# Altium PCB CCS_V4.0.PcbDoc
Units mil, origin at the board's own origin, x right, y up, seen from the top; angles counter-clockwise.
Board outline 2315.79 x 4272.71 mil, 2 copper layers (Top Layer, Bottom Layer); 71 components, 66 nets, 351 pads, 54 vias.
Unrouted connection lines stored in the file: 1.
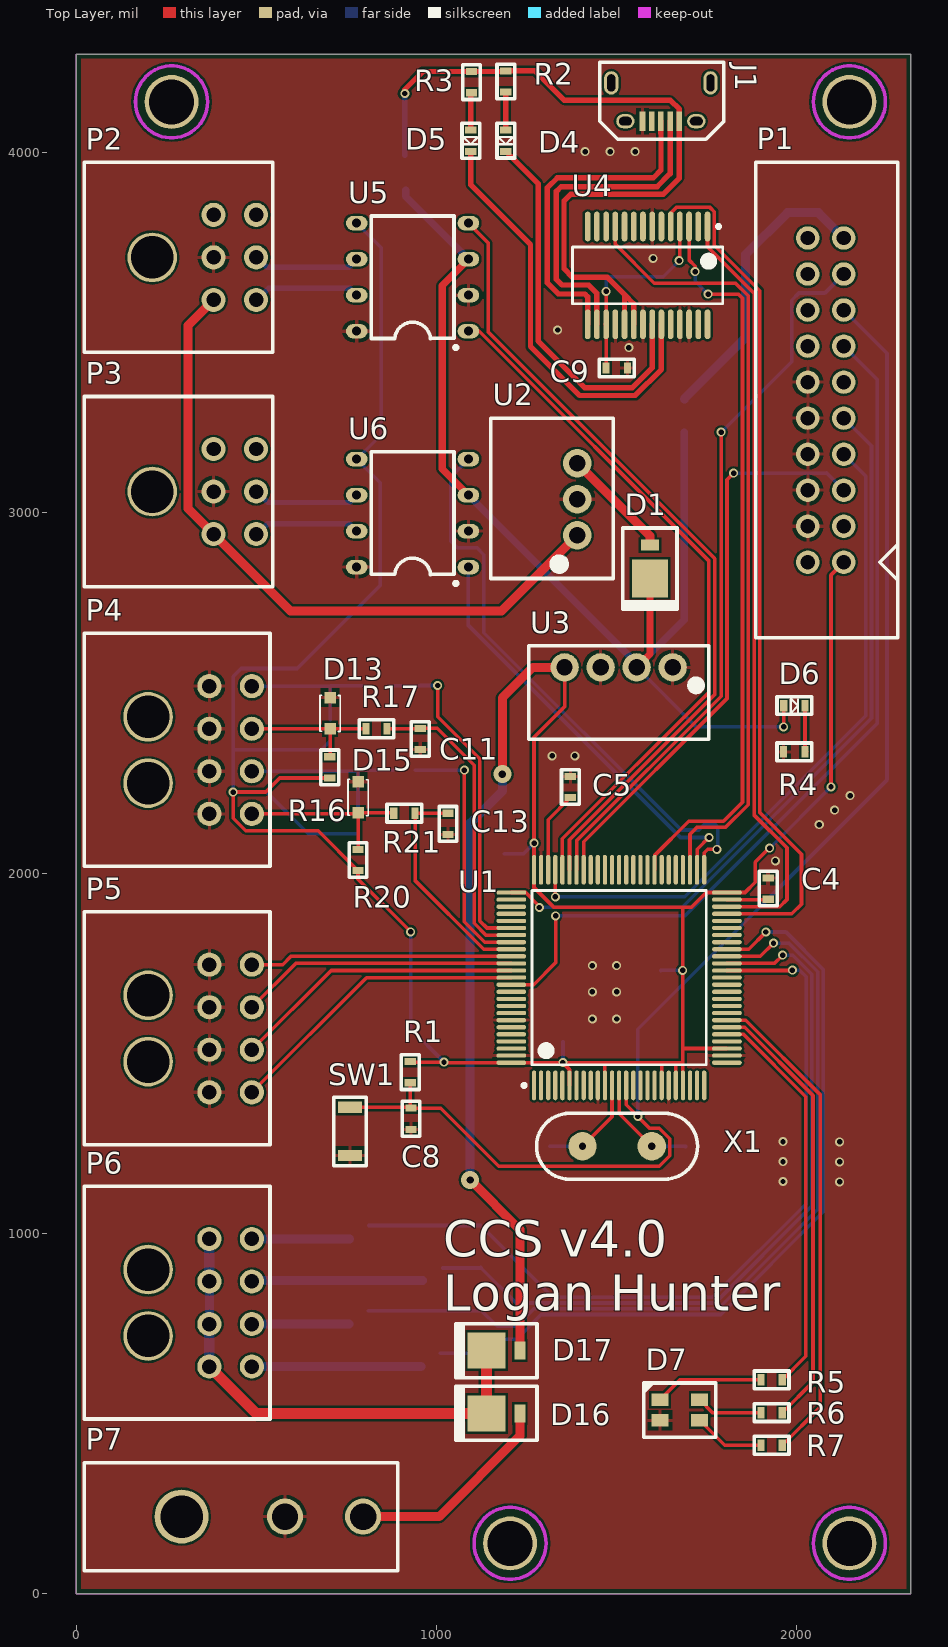
[diagram p0: Top Layer view]
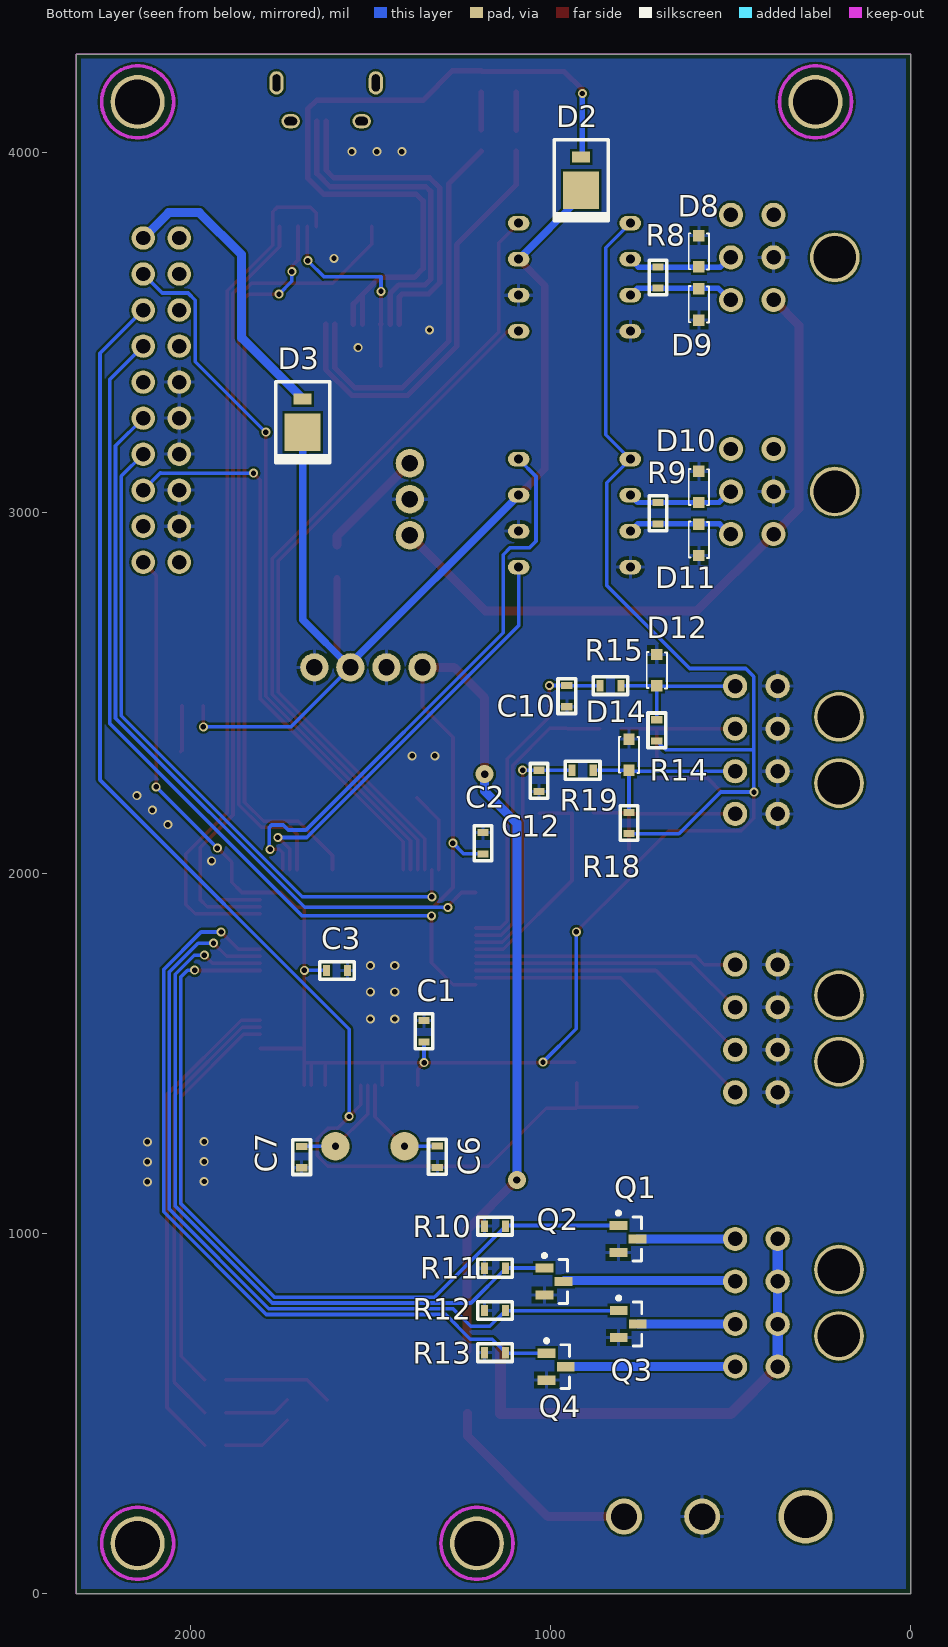
[diagram p1: Bottom Layer view, seen from below]

## Layer stack, top to bottom
Top Solder: solder mask 0.4, Solder Resist, Dk 3.5
Top Layer: signal copper 1.4
Dielectric 1: dielectric 12.6, FR-4, Dk 4.8
Bottom Layer: signal copper 1.4
Bottom Solder: solder mask 0.4, Solder Resist, Dk 3.5

## Board outline
0,0 2315.78,0 2315.78,4272.71 0,4272.71

## Design rules (kind name [scope] priority, off if disabled: settings)
Clearance [All] p1: gap=6 ignorepadtopadclearanceinfootprint=FALSE except(0: Arc-Hole Track-Hole SMDPad-Hole THPad-Hole Via-Hole Fill-Hole Poly-Hole Region-Hole Text-Hole)
DiffPairsRouting [All] p1: maxlimit=10 minlimit=10 mostfreqgap=10 toplayer_minwidth=15 toplayer_maxwidth=15 toplayer_prefwidth=15 bottomlayer_minwidth=15 bottomlayer_maxwidth=15 bottomlayer_prefwidth=15 maxuncoupledlength=500
HoleSize [All] p1: absolutevalues=TRUE maxlimit=200 minlimit=6 maxpercent=80.000 minpercent=20.000
MinimumSolderMaskSliver [All] p1: minsoldermaskwidth=1
PolygonConnect GroundVia [IsVia and InNet('GND')] p1: connectstyle=Direct reliefconductorwidth=10 reliefentries=4 polygonreliefangle="90 Angle" airgapwidth=10
PolygonConnect PolygonConnect_1 [All] p2: connectstyle=Relief reliefconductorwidth=10 reliefentries=4 polygonreliefangle="90 Angle" airgapwidth=10
RoutingVias [All] p1: holewidth=20 width=30 viastyle="Through Hole" minholewidth=12 minwidth=20 maxholewidth=70 maxwidth=100
SilkToSilkClearance [All] p1: silktosilkclearance=3
SilkToSolderMaskClearance [IsPad] p1: minsilkscreentomaskgap=2 clearancetoexposedcopper=TRUE
SolderMaskExpansion [All] p1: expansion=4
Width [All] p1: maxlimit=30 minlimit=5 preferedwidth=10
25 further rules are at their usual default settings.

## Classes and differential pairs
component class Power: C1 C2 C3 C8 D1 D2 D3 D6 R1 R4 SW1 U2 U3
component class MCU: C4 C5 C6 C7 D7 R5 R6 R7 U1 X1
component class Connectors: C10 C11 C12 C13 D8 D9 D10 D11 D12 D13 D14 D15 D16 D17 J1 P1 P2 P3 P4 P5 P6 P7 R14 R15 R16 R17 R18 R19 R20 R21
component class Communications: C9 D4 D5 R2 R3 R8 R9 U4 U5 U6
component class "12V Input Circuitry": Q1 Q2 Q3 Q4 R10 R11 R12 R13
differential pair USBD: +USBD_P -USBD_N
differential pair CAN2: +CAN2_P -CAN2_N
differential pair CAN1: +CAN1_P -CAN1_N

## Components (designator, comment, footprint, x,y, rotation, side; value= is the part's Value field where it differs from the comment)
C1 "SCH_GENERIC_CAPACITOR_0603" PCB_GENERIC_SMD_0603 1350.99,1561.01 r270 bottom
C2 "SCH_GENERIC_CAPACITOR_0603" PCB_GENERIC_SMD_0603 1187.24,2082.68 r270 bottom
C3 "SCH_GENERIC_CAPACITOR_0603" PCB_GENERIC_SMD_0603 1592.43,1729.6 r0 bottom
C4 "SCH_GENERIC_CAPACITOR_0603" PCB_GENERIC_SMD_0603 1920.66,1956.93 r270 top
C5 "SCH_GENERIC_CAPACITOR_0603" PCB_GENERIC_SMD_0603 1371.41,2239.01 r270 top
C6 "SCH_GENERIC_CAPACITOR_0603" PCB_GENERIC_SMD_0603 1313.75,1212.29 r90 bottom
C7 "SCH_GENERIC_CAPACITOR_0603" PCB_GENERIC_SMD_0603 1690.8,1211.49 r90 bottom
C8 "SCH_GENERIC_CAPACITOR_0603" PCB_GENERIC_SMD_0603 929.07,1317.85 r270 top
C9 "SCH_GENERIC_CAPACITOR_0603" PCB_GENERIC_SMD_0603 1499.92,3402.23 r0 top
C10 "SCH_GENERIC_CAPACITOR_0603" PCB_GENERIC_SMD_0603 954.46,2491.15 r90 bottom
C11 "SCH_GENERIC_CAPACITOR_0603" PCB_GENERIC_SMD_0603 954.46,2372.2 r90 top
C12 "SCH_GENERIC_CAPACITOR_0603" PCB_GENERIC_SMD_0603 1031.58,2255.93 r90 bottom
C13 "SCH_GENERIC_CAPACITOR_0603" PCB_GENERIC_SMD_0603 1031.58,2136.61 r90 top
D1 "Schottky Diode" "ON Semi Schottky Diode - MBRM110LT1G" 1592.26,2882.97 r90 top
D2 "Schottky Diode" "ON Semi Schottky Diode - MBRM110LT1G" 914.54,3960.27 r90 bottom
D3 "Schottky Diode" "ON Semi Schottky Diode - MBRM110LT1G" 1687.69,3288.5 r90 bottom
D4 "Green LED" SMD_0603_LED 1194.24,4033.22 r270 top
D5 "Orange LED" SMD_0603_LED 1097.05,4033.07 r270 top
D6 "Red LED" SMD_0603_LED 1993.01,2466.75 r0 top
D7 "TriColourLED" "TricolourLED - SunLED - DK  1497-1225-2-ND" 1675.28,509.28 r180 top
D8 "TVS Diode" "TVS Diode" 587.99,3726.11 r0 bottom
D9 "TVS Diode" "TVS Diode" 587.99,3578.26 r180 bottom
D10 "TVS Diode" "TVS Diode" 587.99,3071.97 r0 bottom
D11 "TVS Diode" "TVS Diode" 587.99,2924.66 r180 bottom
D12 "TVS Diode" "TVS Diode" 704.84,2563.6 r0 bottom
D13 "TVS Diode" "TVS Diode" 704.43,2443.79 r180 top
D14 "TVS Diode" "TVS Diode" 781.78,2328.52 r0 bottom
D15 "TVS Diode" "TVS Diode" 782.03,2210.26 r180 top
D16 "Schottky Diode" "ON Semi Schottky Diode - MBRM110LT1G" 1203.8,499.99 r0 top
D17 "Schottky Diode" "ON Semi Schottky Diode - MBRM110LT1G" 1203.8,674.32 r0 top
J1 "Amphenol MicroUSB" "Amphenol MicroUSB" 1622.6,4087.1 r180 top
P1 "SWD/VCOM Header" "Samtec TST-110-01-G-D" 2130.47,3762.85 r270 top
P2 "CAN1" PCB_MLX_MICROFIT_3X2 210.65,3709.07 r270 top
P3 "CAN2" PCB_MLX_MICROFIT_3X2 210.65,3059.07 r270 top
P4 "Board Level Inputs" PCB_MLX_MICROFIT_4X2 369.12,2341.59 r270 top
P5 "Board Level Outputs" PCB_MLX_MICROFIT_4X2 369.12,1568.56 r270 top
P6 "12V Outputs" PCB_MLX_MICROFIT_4X2 369.12,807.18 r270 top
P7 "12V Power - Outputs" "Molex Mini-Fit Jr 2x1" 291.95,213.54 r270 top
Q1 "NMOS" "NMOS - SSM3K333R - SOTFL95P180X88-3M" 784.75,984.13 r180 bottom
Q2 "NMOS" "NMOS - SSM3K333R - SOTFL95P180X88-3M" 990.15,866.26 r180 bottom
Q3 "NMOS" "NMOS - SSM3K333R - SOTFL95P180X88-3M" 783.93,748.02 r180 bottom
Q4 "NMOS" "NMOS - SSM3K333R - SOTFL95P180X88-3M" 984.09,629.75 r180 bottom
R1 "SCH_GENERIC_RESISTOR_0603" PCB_GENERIC_SMD_0603 926.98,1447.48 r90 top
R2 "SCH_GENERIC_RESISTOR_0603" PCB_GENERIC_SMD_0603 1192.39,4197.15 r270 top
R3 "SCH_GENERIC_RESISTOR_0603" PCB_GENERIC_SMD_0603 1097.05,4195.64 r270 top
R4 "SCH_GENERIC_RESISTOR_0603" PCB_GENERIC_SMD_0603 1993.01,2336.32 r180 top
R5 "SCH_GENERIC_RESISTOR_0603" PCB_GENERIC_SMD_0603 1930.06,593 r180 top
R6 "SCH_GENERIC_RESISTOR_0603" PCB_GENERIC_SMD_0603 1930.06,502.23 r180 top
R7 "SCH_GENERIC_RESISTOR_0603" PCB_GENERIC_SMD_0603 1930.06,411.47 r180 top
R8 "CAN Termination" PCB_GENERIC_SMD_0603 701.55,3653.25 r270 bottom
R9 "CAN Termination" PCB_GENERIC_SMD_0603 701.55,2998.65 r270 bottom
R10 "SCH_GENERIC_RESISTOR_0603" PCB_GENERIC_SMD_0603 1153.86,1019.98 r0 bottom
R11 "SCH_GENERIC_RESISTOR_0603" PCB_GENERIC_SMD_0603 1153.86,902.93 r0 bottom
R12 "SCH_GENERIC_RESISTOR_0603" PCB_GENERIC_SMD_0603 1153.86,785.87 r0 bottom
R13 "SCH_GENERIC_RESISTOR_0603" PCB_GENERIC_SMD_0603 1153.86,668.82 r0 bottom
R14 "SCH_GENERIC_RESISTOR_0603" PCB_GENERIC_SMD_0603 704.42,2396.09 r90 bottom
R15 "SCH_GENERIC_RESISTOR_0603" PCB_GENERIC_SMD_0603 833.3,2520.34 r0 bottom
R16 "SCH_GENERIC_RESISTOR_0603" PCB_GENERIC_SMD_0603 703.54,2293.4 r90 top
R17 "SCH_GENERIC_RESISTOR_0603" PCB_GENERIC_SMD_0603 833.3,2400.6 r0 top
R18 "SCH_GENERIC_RESISTOR_0603" PCB_GENERIC_SMD_0603 782.01,2138.89 r90 bottom
R19 "SCH_GENERIC_RESISTOR_0603" PCB_GENERIC_SMD_0603 910.65,2285.25 r0 bottom
R20 "SCH_GENERIC_RESISTOR_0603" PCB_GENERIC_SMD_0603 781.91,2036.19 r90 top
R21 "SCH_GENERIC_RESISTOR_0603" PCB_GENERIC_SMD_0603 910.65,2166.39 r0 top
SW1 "Reset Switch" "Push Button Switch" 759.58,1282.81 r270 top
U1 "STM32F407VGT6" STM-LQFP100_M 1506.61,1709.77 r90 top
U2 "R78E-1.0 DC/DC" R78-1.0 1390.34,3037.63 r90 top
U3 "RECOM RO Series" "RECOM RO Series 1W DCDC" 1655.24,2570.96 r180 top
U4 "IC_FT232RL" SSOP-28 1585.69,3659.02 r270 top
U5 "MCP2562" MCP2562 933.27,3654.07 r180 top
U6 "MCP2562" MCP2562 933.27,2999.07 r180 top
X1 "XTAL" CRYSTAL_8MHZ 1501.05,1241.53 r0 top

## Footprints (in the part's own frame and the unit in brackets; to place one, negate y for a bottom-side part, rotate by r counter-clockwise, add the part's x,y. Pads: shape width x height; smd on the part's side, far side on the other; paste and mask are expansions set on the pad)
"Amphenol MicroUSB" [mm] "10118194-0001LF"
  rect 0.4x1.35 smd: 1(-1.3,0) 2(-0.65,0) 3(0,0) 4(0.65,0) 5(1.3,0)
  oval 1x1.65 hole 0.55 slot 1.2 at 90 deg: ""(-3.5,-2.7) ""(3.5,-2.7)
  oval 1.3x1 hole 0.6 slot 0.9 at 0 deg: ""(-2.5,0) ""(2.5,0)
  silkscreen extent -4.44,-4.15 4.32,1.27, body extent -4.06,-5.21 4.06,0.51, height 2.4
CRYSTAL_8MHZ [mm] "631-1100-ND"
  round 2 hole 0.5: 1(-2.44,0) 2(2.44,0)
  silkscreen extent -5.68,-2.32 5.68,2.32, body extent -5.59,-1.85 5.59,1.85, height 3.6
MCP2562 [mil]
  oval 60x40 hole 25: 1(-155,150) 2(-155,50) 3(-155,-50) 4(-155,-150) 5(155,-150) 6(155,-50) 7(155,50) 8(155,150)
  silkscreen extent -125,-170 115,200, body extent -115,-170 115,170, height 210
"Molex Mini-Fit Jr 2x1" [mil]
  round 100 hole 73: 1(0,287) 2(0,504)
  round 150 hole 118: ""(0,0)
  silkscreen extent -150,-270 150,600, body extent -111,-260 117,525, height 449
"NMOS - SSM3K333R - SOTFL95P180X88-3M" [mm] "SOTFL, 3-Leads, Body 2.90x1.80mm, Pitch 0.95mm, IPC Low Density"
  rect 1.25x0.65 smd: 1(-0.675,0.95) 2(-0.675,-0.95) 3(0.675,0)
  silkscreen extent -0.8,-1.55 0.95,1.95, body extent -0.95,-1.55 0.95,1.55, height 0.88
"ON Semi Schottky Diode - MBRM110LT1G" [mil]
  rect 105x100 smd: 1(-65,0)
  rect 30x50 smd: 2(27.5,0)
  silkscreen extent -150,-75 75,75, body extent -115,-65 0,65, height 40
PCB_GENERIC_SMD_0603 [mm]
  rect 0.5x0.8 smd: 1(-0.75,0) 2(0.75,0)
  silkscreen extent -1.22,-0.63 1.22,0.63, body extent -0.75,-0.5 0.75,0.5, height 0.45
PCB_MLX_MICROFIT_3X2 [mm]
  round 1.7 hole 1.02: 1(3,4.32) 2(0,4.32) 3(-3,4.32) 4(3,7.32) 5(0,7.32) 6(-3,7.32)
  round 3.5 hole 3: ""(0,0)
  silkscreen extent -6.7,-4.8 6.7,8.5, body extent -6.57,-4.65 6.58,7.59, height 8.83
PCB_MLX_MICROFIT_4X2 [mm] "Molex MicroFit 4x2 Connector"
  round 1.7 hole 1.02: 1(4.5,0) 2(1.5,0) 3(-1.5,0) 4(-4.5,0) 5(4.5,3) 6(1.5,3) 7(-1.5,3) 8(-4.5,3)
  round 3.5 hole 3: ""(-2.34,-4.32) ""(2.34,-4.32)
  silkscreen extent -8.23,-8.82 8.2,4.28, body extent -8.05,-8.87 8.1,3.37, height 8.83
"Push Button Switch" [mm]
  rect 0.8x1.7 smd: 1(-1.7,0) 2(1.7,0)
  silkscreen extent -2.41,-1.14 2.41,1.14, body extent -2.16,-0.89 2.16,0.89, height 1.6
R78-1.0 [mm]
  round 2 hole 1.15: 1(-2.54,0) 2(0,0) 3(2.54,0)
  silkscreen extent -5.59,-2.54 5.71,6.1, body extent -4.44,-1.59 4.45,5.4, height 10.4
"RECOM RO Series 1W DCDC" [mm] "RO-053.3S"
  round 2 hole 1.15: 1(0,0) 2(2.54,0) 3(5.08,0) 4(7.62,0)
  silkscreen extent -2.54,-1.52 10.16,5.08, body extent -2.41,-1.4 10.03,4.95, height 10
"Samtec TST-110-01-G-D" [mil] "TST-110-01-G-D"
  round 65 hole 40: 1(900,0) 2(900,-100) 3(800,0) 4(800,-100) 5(700,0) 6(700,-100) 7(600,0) 8(600,-100) 9(500,0) 10(500,-100) 11(400,0) 12(400,-100) 13(300,0) 14(300,-100) 15(200,0) 16(200,-100) 17(100,0) 18(100,-100) 19(0,0) 20(0,-100)
  silkscreen extent -210,-245 1110,150, body extent -200,-233 1100,132, height 350
SMD_0603_LED [mm]
  rect 0.5x0.8 smd: 1(-0.747,-0.047) 2(0.753,-0.047)
  silkscreen extent -1.22,-0.67 1.23,0.58, body extent -0.75,-0.55 0.75,0.45, height 0.45
SSOP-28 [mm] "28-Pin SSOP 0.65 mm Pitch"
  oval 2.1x0.4 smd: 1(-3.45,4.225) 2(-3.45,3.575) 3(-3.45,2.925) 4(-3.45,2.275) 5(-3.45,1.625) 6(-3.45,0.975) 7(-3.45,0.325) 8(-3.45,-0.325) 9(-3.45,-0.975) 10(-3.45,-1.625) 11(-3.45,-2.275) 12(-3.45,-2.925) 13(-3.45,-3.575) 14(-3.45,-4.225) 15(3.45,-4.225) 16(3.45,-3.575) 17(3.45,-2.925) 18(3.45,-2.275) 19(3.45,-1.625) 20(3.45,-0.975) 21(3.45,-0.325) 22(3.45,0.325) 23(3.45,0.975) 24(3.45,1.625) 25(3.45,2.275) 26(3.45,2.925) 27(3.45,3.575) 28(3.45,4.225)
  silkscreen extent -3.57,-5.3 2,5.3, body extent -2.7,-5.3 2.7,5.3, height 2
STM-LQFP100_M [mm] "Thin QFP, 100-Leads, Body 14x14mm, Pitch 0.5mm, IPC Low Density"
  oval 2.1x0.3 smd: 1(-7.6,6) 2(-7.6,5.5) 3(-7.6,5) 4(-7.6,4.5) 5(-7.6,4) 6(-7.6,3.5) 7(-7.6,3) 8(-7.6,2.5) 9(-7.6,2) 10(-7.6,1.5) 11(-7.6,1) 12(-7.6,0.5) 13(-7.6,0) 14(-7.6,-0.5) 15(-7.6,-1) 16(-7.6,-1.5) 17(-7.6,-2) 18(-7.6,-2.5) 19(-7.6,-3) 20(-7.6,-3.5) 21(-7.6,-4) 22(-7.6,-4.5) 23(-7.6,-5) 24(-7.6,-5.5) 25(-7.6,-6) 51(7.6,-6) 52(7.6,-5.5) 53(7.6,-5) 54(7.6,-4.5) 55(7.6,-4) 56(7.6,-3.5) 57(7.6,-3) 58(7.6,-2.5) 59(7.6,-2) 60(7.6,-1.5) 61(7.6,-1) 62(7.6,-0.5) 63(7.6,0) 64(7.6,0.5) 65(7.6,1) 66(7.6,1.5) 67(7.6,2) 68(7.6,2.5) 69(7.6,3) 70(7.6,3.5) 71(7.6,4) 72(7.6,4.5) 73(7.6,5) 74(7.6,5.5) 75(7.6,6)
  oval 0.3x2.1 smd: 26(-6,-7.6) 27(-5.5,-7.6) 28(-5,-7.6) 29(-4.5,-7.6) 30(-4,-7.6) 31(-3.5,-7.6) 32(-3,-7.6) 33(-2.5,-7.6) 34(-2,-7.6) 35(-1.5,-7.6) 36(-1,-7.6) 37(-0.5,-7.6) 38(0,-7.6) 39(0.5,-7.6) 40(1,-7.6) 41(1.5,-7.6) 42(2,-7.6) 43(2.5,-7.6) 44(3,-7.6) 45(3.5,-7.6) 46(4,-7.6) 47(4.5,-7.6) 48(5,-7.6) 49(5.5,-7.6) 50(6,-7.6) 76(6,7.6) 77(5.5,7.6) 78(5,7.6) 79(4.5,7.6) 80(4,7.6) 81(3.5,7.6) 82(3,7.6) 83(2.5,7.6) 84(2,7.6) 85(1.5,7.6) 86(1,7.6) 87(0.5,7.6) 88(0,7.6) 89(-0.5,7.6) 90(-1,7.6) 91(-1.5,7.6) 92(-2,7.6) 93(-2.5,7.6) 94(-3,7.6) 95(-3.5,7.6) 96(-4,7.6) 97(-4.5,7.6) 98(-5,7.6) 99(-5.5,7.6) 100(-6,7.6)
  silkscreen extent -7.72,-6.15 6.15,6.82, body extent -7,-7 7,7, height 1.6
"TricolourLED - SunLED - DK  1497-1225-2-ND" [mm]
  rect 1.2x0.9 smd: 1(1.4,-0.725) 2(-1.4,-0.725) 3(-1.4,0.725) 4(1.4,0.725)
  silkscreen extent -2.54,-1.91 2.54,1.91, body extent -1.84,-1.52 1.84,1.52, height 1.9
"TVS Diode" [mm]
  rect 0.8x0.8 smd: 1(0,1.1) 2(0,-1.1)
  silkscreen extent -0.71,-1.27 0.71,1.3, body extent -0.65,-1.27 0.65,1.27, height 1.04

## Part data
C1 C2 C3 C4 C5 C6 C7 C8 C9 C10 C11 C12 C13: "Generic SMD capacitor 0603"
D1 D2 D3 D16 D17: library part "ON Semi Schottky Diode - MBRM110LT1G"
D4 D5 D6: library part SMD_0603_LED
J1: library part "Amphenol MicroUSB - 609-4618-1-ND"
P2 P3: library part SCH_MLX_MICROFIT_3X2
P4 P5 P6: library part SCH_MLX_MICROFIT_4X2, "Molex Microfit Connector 4x2"
P7: library part "Molex Mini-Fit 1x2"
Q1 Q2 Q3 Q4: library part "NMOS - SSM3K333R"
R1 R2 R3 R4 R5 R6 R7 R10 R11 R12 R13 R14 R15 R16 R17 R18 R19 R20 R21: "Generic SMD resistor 0603"
R8 R9: library part SCH_GENERIC_RESISTOR_0603, "Generic SMD resistor 0603"
SW1: library part PushButtonSwitch
U1: "ARM Cortex-M4 32-bit MCU+FPU, 210 DMIPS, 1024 kB Flash, 192 kB Internal RAM, 82 I/Os, 100-pin LQFP, -40 to 85 degC, Tray"
U2: library part R78E-1.0
U3: library part "RECOM RO Series DCDC Converter"
U4: "FT232R USB UART"
X1: library part Crystal

## Free pads (board coordinates)
  round 150 hole 125: ""(264.22,4140.77) ""(1204.05,139.25) ""(2145.85,139.25) ""(2145.85,4140.77)

## Via types
v1: diameter 25, hole 15, Top Layer to Bottom Layer, 52 vias
v2: diameter 50, hole 20, Top Layer to Bottom Layer, 2 vias

## Nets (pads, with @x,y where several pads share a name; then routed paths per layer and width w, separated by ;. In a path a pad name is that pad's centre, name@x,y a point inside that pad or via, vN(x,y) a via of type N, cw(c..) or ccw(c..) an arc to the next point about the centre after c; other vN are vias at no path point)
3V3: C1.2 C2.2 C3.2 D17.2 P1.1 R1.2 R14.1 R16.1 R18.1 R20.1 U1.6 U1.11 U1.19 U1.21 U1.22 U1.28 U1.50 U1.75 U1.100 U3.4 U5.5 U6.5 | length 10249
  Top Layer w10: v1(435.03,2224.72) 435.71,2224.04 435.71,2152.08 470.25,2117.54 671.03,2117.54 R20.1 781.91,1983.08 v1(927.98,1837) ; v1@435.03,2225.1 525.46,2225.1 564.24,2263.87 R16.1 ; R1.2@932.17,1475.26 v1(1020.62,1475.26) 1022.33,1473.55 U1.100 1349.7,1473.55 1368.82,1454.44 U1.6 ; v1(1350.52,1473.54) 1466.03,1473.54 ; U3.4 1355.24,2461.77 1270.39,2376.92 U1.75 1270.39,1959.7 1324.5,1905.59 1667.42,1905.59 1707.95,1905.59 1748.36,1945.99 U1.50 1856.19,1945.99 1884.3,1974.1 1884.3,2030.54 1922.78,2069.01 v1(1924.38,2069.01) ; U1.11 1467.24,1472.33 1466.03,1473.54 ; U1.19 1624.72,1472.58 1623.77,1473.54 ; U1.21 1664.09,1472.51 1663.06,1473.54 ; 1683.22,1904.36 1683.22,1512.92 ; U1.22 1683.78,1473.7 ; U1.28 1683.22,1512.92 ; v1(2094.79,2239.1) 2094.79,2827.17 P1.1 ; 1466.03,1473.54 1623.77,1473.54 ; 1623.77,1473.54 1663.06,1473.54 ; 1663.06,1473.54 1683.61,1473.54 1683.78,1473.7 ; 1683.22,1512.92 1683.78,1512.37 1683.78,1473.7
  Top Layer w25: v2(1093.26,1148.15) 1231.3,1010.11 D17.2 ; v2(1182.38,2274.43) 1182.38,2486.1 1267.24,2570.96 U3.4
  Bottom Layer w10: v1@435.03,2225.1 527.62,2225.1 643.35,2109.37 R18.1 ; v1@435.33,2227.98 435.33,2302.79 435.39,2302.85 435.39,2545.45 457.91,2567.97 613.32,2567.97 843.62,2798.27 843.62,3083.71 U6.5 846.13,3216.93 846.13,3736.21 U5.5 ; 435.51,2342.16 680.02,2342.16 R14.1 ; v1(927.98,1837) 927.98,1567.9 v1(1020.62,1475.26) ; C2.2 1240.6,2053.15 v1(1270.68,2083.24) ; v1(1350.52,1473.54) 1350.99,1474.01 C1.2 ; C3.2 1622.35,1729.99 v1(1682.86,1729.99) ; v1(1924.38,2069.01) 2094.47,2239.1 v1(2094.79,2239.1)
  Bottom Layer w25: v2(1093.26,1148.15) 1093.26,2138.52 1182.38,2227.64 v2(1182.38,2274.43)
3V3_INPUT_1: C10.2 R15.2 U1.81 | length 937.4
  Top Layer w10: v1(1002.78,2520.54) 1002.78,2434.19 1120.08,2316.89 1120.08,1867.16 1139.68,1847.57 U1.81
  Bottom Layer w10: R15.2 954.12,2520.34 C10.2 v1@1002.65,2520.68
3V3_INPUT_1_INTERNAL: D12.1 P4.8 R14.2 R15.1 | length 412
  Bottom Layer w10: P4.8 703.3,2518.75 D12.1 ; R14.2 704.84,2426.03 D12.1 ; R15.1@803.72,2520.29 D12.1
3V3_INPUT_2: C11.2 R17.2 U1.82 | length 838.4
  Top Layer w10: R17.2 C11.2@953.56,2400.6 ; C11.2 1001.67,2401.73 1104.08,2299.31 1104.08,1860.54 1136.74,1827.88 U1.82
3V3_INPUT_2_INTERNAL: D13.1 P4.7 R16.2 R17.1 | length 394.4
  Top Layer w10: P4.7 704.27,2400.64 D13.1 ; R16.2 704.43,2323.82 D13.1 ; R17.1@803.66,2400.49 D13.1
3V3_INPUT_3: C12.2 R19.2 U1.83 | length 711.4
  Top Layer w10: v1(1077.16,2285.45) 1077.16,1864.84 1133.8,1808.2 U1.83
  Bottom Layer w10: R19.2 1031.37,2285.25 C12.2 v1(1077.16,2285.45)
3V3_INPUT_3_INTERNAL: D14.1 P4.6 R18.2 R19.1 | length 511.9
  Bottom Layer w10: P4.6 779.1,2282.53 D14.1 ; R18.2 781.78,2168.65 D14.1 ; R19.1 D14.1
3V3_INPUT_4: C13.2 R21.2 U1.84 | length 624.5
  Top Layer w10: C13.2@1031.32,2166.39 R21.2 940.18,1979.19 1130.85,1788.51 U1.84
3V3_INPUT_4_INTERNAL: D15.1 P4.5 R20.2 R21.1 | length 495.5
  Top Layer w10: P4.5 779.49,2164.42 D15.1 ; R20.2@782.03,2065.84 D15.1 ; R21.1@880.56,2166.96 D15.1
3V3_OUTPUT_1: P5.8 U1.85 | length 729.7
  Top Layer w10: P5.8 572.81,1745.72 595.91,1768.83 U1.85
3V3_OUTPUT_2: P5.7 U1.86 | length 770.5
  Top Layer w10: P5.7 608.76,1749.14 U1.86
3V3_OUTPUT_3: P5.6 U1.87 | length 811.3
  Top Layer w10: P5.6 707.18,1729.46 U1.87
3V3_OUTPUT_4: P5.5 U1.88 | length 852.1
  Top Layer w10: P5.5 805.61,1709.77 U1.88
5V: D1.1 D2.1 D3.1 D6.1 U3.2 U5.3 U6.3 | length 3155.4
  Top Layer w10: v1(1963.6,2405.97) D6.1
  Top Layer w20: U6.3 1015.5,3121.84 1015.5,3631.3 U5.3 ; U3.2 1592.26,2607.98 D1.1
  Bottom Layer w10: U3.2 1720.25,2405.95 ; 1720.27,2405.97 v1(1963.6,2405.97)
  Bottom Layer w20: D2.1 914.54,3877.8 U5.3 ; U6.3 1555.24,2582.1 U3.2 1687.69,2703.42 D3.1
"5V - DCDC": D1.2 U2.3 | length 310.8
  Top Layer w25: U2.3 1592.26,2935.72 D1.2
"5V - DEBUG": D3.2 P1.19 | length 821.5
  Bottom Layer w25: D3.2 1857.42,3485.72 1857.42,3716.45 1974.42,3833.45 2059.87,3833.45 P1.19
"5V - USB": D2.2 J1.1 R2.1 R3.1 U4.19 U4.20 | length 2109.1
  Top Layer w15: v1(911.58,4164.01) 911.58,4174.64 962.11,4225.17 R3.1 1190.87,4225.17 R2.1 1272.8,4226.68 1354.4,4145.08 1649.17,4145.08 1673.78,4120.47 J1.1 1673.78,3929.17 1628.75,3884.15 1371.78,3884.15 1353.6,3865.97 1353.6,3677.79 1377.84,3653.55 1473.9,3653.55 1521.72,3605.74 ; U4.19 1521.72,3605.74 ; U4.20 1547.31,3580.15 1521.72,3605.74
  Bottom Layer w15: v1(911.58,4164.01) 911.98,4163.61 D2.2@911.98,3992.94
12V: P2.1 P3.1 U2.1 | length 1893.9
  Top Layer w25: P2.1 309.5,3519.73 309.5,3012.19 P3.1 593.98,2727.71 1180.42,2727.71 U2.1
"12V - OUTPUTS": D16.2 P7.2 | length 589.6
  Top Layer w25: P7.2 1007.01,213.54 1230.83,437.36 D16.2@1230.83,499.42
12V_OUTPUT_CONNECTOR_1: P6.8 Q1.3 | length 270.7
  Bottom Layer w25: P6.8 Q1.3@757.95,984.34
12V_OUTPUT_CONNECTOR_2: P6.7 Q2.3 | length 475.3
  Bottom Layer w25: P6.7@485.73,869.22 Q2.3@960.99,869.22
12V_OUTPUT_CONNECTOR_3: P6.6 Q3.3 | length 270
  Bottom Layer w25: P6.6 Q3.3@757.25,748.12
12V_OUTPUT_CONNECTOR_4: P6.5 Q4.3 | length 470
  Bottom Layer w25: P6.5 Q4.3@957.25,630.01
12V_OUTPUT_MCU_1: Q1.1 R10.1 U1.39 | length 2262.3
  Top Layer w10: U1.39 1986.98,1729.46 v1(1987.78,1730.26)
  Bottom Layer w10: Q1.1 R10.1@1121.46,1021.53 ; R10.1@1121.46,1022.85 R10.1 1321.72,822.59 1765.94,822.59 2025.72,1082.37 2025.72,1711.83 2007.29,1730.26 v1(1987.78,1730.26)
12V_OUTPUT_MCU_2: Q2.1 R11.1 U1.40 | length 2090.1
  Top Layer w10: U1.40 1937.69,1749.14 v1(1960.6,1772.05)
  Bottom Layer w10: Q2.1 R11.1@1123.59,903.67 ; R11.1@1122.27,904.99 R11.1@1123.59,903.67 ; R11.1@1124.33,903.67 R11.1@1123.59,903.67 ; v1(1960.6,1772.05) 1988.96,1772.05 2041.72,1719.29 2041.72,1075.75 1772.56,806.59 1220.66,806.59 R11.1 R11.1@1123.59,903.67
12V_OUTPUT_MCU_3: Q3.1 R12.1 U1.41 | length 2359.8
  Top Layer w10: U1.41 1898.62,1768.83 v1(1935.3,1805.5)
  Bottom Layer w10: Q3.1 R12.1@1123.46,785.42 ; R12.1@1123.46,786.74 R12.1 1168.42,741.78 1221.6,741.78 1270.42,790.59 1781.83,790.59 2057.72,1066.48 2057.72,1725.92 1978.14,1805.5 v1(1935.3,1805.5)
12V_OUTPUT_MCU_4: Q4.1 R13.1 U1.42 | length 2228.9
  Top Layer w10: U1.42 1866.18,1788.51 v1(1914.18,1836.51)
  Bottom Layer w10: Q4.1 R13.1@1123.98,667.15 ; R13.1@1123.98,668.47 R13.1 1161.56,706.05 1222.2,706.05 1290.74,774.59 1788.83,774.59 2073.72,1059.48 2073.72,1732.55 1969.76,1836.51 v1(1914.18,1836.51)
BLUE_LED: R7.1 U1.32 | length 1361.3
  Top Layer w10: U1.32 1858.05,1591.66 2064.44,1385.27 2064.44,516.32 R7.1
CAN1_N: D8.1 P2.5 R8.1 U5.6 | length 297.1
  Bottom Layer w15: P2.5@501.46,3709.07 528.48,3682.05 756.25,3682.05 U5.6
CAN1_P: D9.1 P2.4 R8.2 U5.7 | length 297.9
  Bottom Layer w15: P2.4@501.46,3590.96 533.49,3622.99 759.35,3622.99 U5.7
CAN1_RX: U1.70 U5.4 | length 2245.3
  Top Layer w10: U5.4 1143.15,3749.19 1143.15,3501.9 1772,2873.05 1772,2495.61 1368.82,2092.43 U1.70
CAN1_TX: U1.71 U5.1 | length 1957.8
  Top Layer w10: U5.1 1118.35,3504.07 1756,2866.42 1756,2502.24 1349.13,2095.37 U1.71
CAN2_N: D10.1 P3.5 R9.1 U6.6 | length 297.9
  Bottom Layer w15: P3.5@501.46,3059.07 531.93,3028.6 757.8,3028.6 U6.6
CAN2_P: D11.1 P3.4 R9.2 U6.7 | length 297.1
  Bottom Layer w15: P3.4@501.46,2940.96 530.04,2969.54 757.8,2969.54 U6.7
CAN2_RX: U1.51 U6.4 | length 1604.6
  Top Layer w10: U1.51 1742.83,2056.01 1752.9,2066.07 v1(1778.17,2066.07) v1@1778.55,2066.46
  Bottom Layer w10: U6.4 1039.99,3100.8 1039.99,2920.96 1058.18,2902.77 1112.27,2902.77 1131.11,2883.93 1131.11,2667.1 1678.74,2119.47 1727.76,2119.47 1741.66,2133.37 1774.07,2133.37 1780.13,2127.31 1780.13,2068.04 v1(1778.17,2066.07)
CAN2_TX: U1.52 U6.1 | length 1179.8
  Top Layer w10: U1.52 1723.15,2066.4 1756.63,2099.88 v1(1756.63,2098.76)
  Bottom Layer w10: U6.1 1088.27,2687.32 1676.83,2098.76 v1(1756.63,2098.76)
GND: C1.1 C2.1 C3.1 C4.1 C5.1 C6.1 C7.1 C8.2 C9.2 C10.1 C11.1 C12.1 C13.1 D7.4 D8.2 D9.2 D10.2 D11.2 D12.2 D13.2 D14.2 D15.2 J1.5 P1.4 P1.6 P1.8 P1.10 P1.12 P2.2 P3.2 P4.1 P4.2 P4.3 P4.4 P5.1 P5.2 P5.3 P5.4 P7.1 Q1.2 Q2.2 Q3.2 Q4.2 R4.2 R10.2 R11.2 R12.2 R13.2 SW1.2 U1.10 U1.20 U1.27 U1.74 U1.94 U1.99 U2.2 U3.1 U3.3 U4.7 U4.18 U4.21 U4.25 U4.26 U5.2 U5.8 U6.2 U6.8
  other v1: 1961.46,1143.73 2118.94,1143.03 2118.94,1198.29 1961.46,1199 2118.94,1253.56 1961.46,1254.27 1432.17,1594.82 1500,1594.82 1432.17,1670.07 1500,1670.07 1432.17,1743.19 1500,1743.19 1940.4,2034.16 2062.2,2134.18 2105.06,2174.48 2147.93,2214.79 1320.96,2325.48 1383.81,2325.48 1533.52,3458.57 1335.75,3507.6 1600.84,3706.23 1412.29,4002.39 1481.72,4002.39 1551,4002.39
GREEN_LED: R6.1 U1.31 | length 1232.9
  Top Layer w10: U1.31 1855.11,1571.98 2044.75,1382.33 2044.75,587.4 R6.1
NC: U4.8 U4.24
NetC4_2: C4.2 U1.49 | length 119.2
  Top Layer w10: U1.49 C4.2@1925.02,1926.31
NetC5_2: C5.2 U1.73 | length 226
  Top Layer w10: U1.73 1309.76,2147.83 C5.2
NetC7_2: C7.2 U1.13 X1.2 | length 300
  Top Layer w10: U1.13 1506.61,1332.04 X1.2
  Bottom Layer w10: X1.2@1597.56,1241.68 1690.14,1241.68 C7.2
NetC9_1: C9.1 U4.4 U4.17 | length 565.9
  Top Layer w10: U4.17@1470.42,3523.3 v1(1470.42,3614.61) ; C9.1@1470.53,3406.64 U4.17 ; v1@1675.26,3701.58 U4.4
  Top Layer w15: U4.17@1470.42,3523.3 U4.17 ; v1(1673.48,3699.8) v1@1675.26,3701.58
  Bottom Layer w10: v1(1470.42,3614.61) 1470.42,3655.15 1628.83,3655.15 v1(1673.48,3699.8)
NetD4_1: D4.1 R2.2 | length 105
  Top Layer w15: D4.1 R2.2
NetD4_2: D4.2 U4.22 | length 1077.7
  Top Layer w15: D4.2 1281.74,3914.22 1281.74,3477.06 1411.68,3347.13 1543.02,3347.13 1598.49,3402.6 U4.22
NetD5_1: D5.1 R3.2 | length 105
  Top Layer w15: D5.1 R3.2@1095.2,4167.48
NetD5_2: D5.2 U4.23 | length 1185
  Top Layer w15: D5.2 1095.2,3910.32 1260.58,3744.94 1260.58,3461.67 1396.6,3325.65 1551.24,3325.65 1624.08,3398.49 U4.23
NetD6_2: D6.2 R4.1 | length 130.3
  Top Layer w10: D6.2 2022.66,2340.37 R4.1@2026.7,2336.32
NetD7_1: D7.1 R5.2 | length 303.2
  Top Layer w10: D7.1 1675.34,593 R5.2
NetD7_2: D7.2 R6.2 | length 184.9
  Top Layer w10: D7.2 1765.99,502.23 R6.2
NetD7_3: D7.3 R7.2 | length 198.8
  Top Layer w10: D7.3 1799.67,411.47 R7.2
NRST: C8.1 P1.15 R1.1 SW1.1 U1.14 | length 3872.2
  Top Layer w10: SW1.1 926.7,1349.74 C8.1@926.98,1349.46 ; R1.1 C8.1@926.98,1349.46 ; U1.14 1526.3,1356.62 v1(1558.65,1324.26) 1591,1291.91 1618.13,1291.91 1647.48,1262.56 1647.48,1215.41 1618.44,1186.36 1172.81,1186.36 1011.8,1347.37 C8.1 C8.1@926.98,1349.46
  Bottom Layer w10: v1(1558.65,1324.26) 1558.65,1566.58 1558.55,1566.68 2250.36,2258.49 2250.36,3442.96 P1.15
"OUTPUT VOLTAGE (VARIABLE)": D16.1 D17.1 P6.1 P6.2 P6.3 P6.4 | length 1352.2
  Top Layer w30: P6.1 499.14,499.99 D16.1 D17.1
  Bottom Layer w25: P6.2 P6.3
  Bottom Layer w30: P6.1 P6.2 ; P6.3 P6.4
RED_LED: R5.1 U1.30 | length 1104.4
  Top Layer w10: U1.30 1852.16,1552.29 2025.07,1379.39 2025.07,658.48 R5.1
SCLK: C6.2 U1.12 X1.1 | length 294.7
  Top Layer w10: X1.1 1486.93,1323.47 U1.12
  Bottom Layer w10: C6.2 1313.88,1241.68 X1.1@1405.43,1241.68
SWCLK: P1.9 U1.76 | length 2101.2
  Top Layer w10: U1.76 1247.06,1945.99 1285,1908.05 v1(1285,1904.45)
  Bottom Layer w10: v1(1285,1904.45) 1297.88,1904.45 ; 1298.18,1904.76 1682.17,1904.76 2207.28,2429.87 2207.28,3186.04 P1.9
SWDIO: P1.7 U1.72 | length 1896.7
  Top Layer w10: v1(1329.45,1933.88) U1.72
  Bottom Layer w10: v1(1329.45,1933.88) 1688.66,1933.88 2191.28,2436.5 2191.28,3102.04 P1.7
SWO: P1.13 U1.89 | length 2479
  Top Layer w10: U1.89 1269.72,1690.09 1330.28,1750.65 v1(1330.28,1881.26)
  Bottom Layer w10: v1(1330.28,1881.26) 1689.56,1881.26 2223.28,2414.98 2223.28,3370.04 P1.13
UART1_RX: P1.17 U1.69 | length 2003.3
  Top Layer w10: U1.69 1388.5,2089.49 1790.02,2491 v1(1790.02,3223.77)
  Bottom Layer w10: v1(1790.02,3223.77) 1985.58,3419.33 1985.58,3589.79 2006.13,3610.34 2077.96,3610.34 P1.17
UART1_TX: P1.5 U1.68 | length 1600
  Top Layer w10: U1.68 1408.19,2086.55 1806.02,2484.37 1806.02,3091.97 v1(1824.35,3110.3)
  Bottom Layer w10: v1(1824.35,3110.3) 2081.72,3110.3 2082.37,3110.95 P1.5
UART3_CTS: U1.58 U4.3 | length 2054.4
  Top Layer w10: U1.58 1605.04,2048.91 1699.73,2143.6 1796.19,2143.6 1849.24,2196.65 1849.24,3595.62 1837.96,3606.9 v1(1753.6,3606.9) ; U4.3 1700.85,3701.83 1717.95,3684.73 v1(1717.95,3669.66)
  Bottom Layer w10: v1(1717.95,3669.66) 1717.95,3642.55 v1(1753.6,3606.9)
UART3_RTS: U1.53 U4.11 | length 2184.5
  Top Layer w10: U4.11 1496.13,3745.99 1604.58,3637.53 1829.96,3637.53 1865.24,3602.25 1865.24,2190.02 1802.81,2127.6 1723.13,2127.6 1703.46,2107.93 U1.53
UART3_RX: U1.48 U4.1 | length 2134.9
  Top Layer w10: U4.1 1752.03,3738.77 1881.24,3609.57 1881.24,2161.28 1972.59,2069.93 1972.59,1926.33 1952.83,1906.56 1805.82,1906.56 U1.48
UART3_TX: U1.47 U4.5 | length 2410.7
  Top Layer w10: U4.5 1649.67,3832.38 1665.12,3847.83 1759.2,3847.83 1770.9,3836.13 1770.9,3742.52 1897.24,3616.19 1897.24,2167.91 2012.8,2052.35 2012.8,1913.7 1986.04,1886.94 U1.47
USBD_N: J1.2 U4.16 | length 940.3
  Top Layer w15: U4.16 1444.94,3603.32 1444.42,3603.84 1444.42,3609.95 1421.82,3632.55 1348.26,3632.55 1332.6,3648.21 1332.6,3892.21 1345.54,3905.15 1611.95,3905.15 1648.19,3941.39 J1.2
USBD_P: J1.3 U4.15 | length 940
  Top Layer w15: U4.15 1419.35,3599.66 1411.47,3607.55 1337.91,3607.55 1307.6,3637.86 1307.6,3902.56 1335.18,3930.15 1601.59,3930.15 1622.8,3951.36 1622.8,4052.82 1622.6,4053.03 J1.3
pads on no net: J1. J1.4 P1.2 P1.3 P1.11 P1.14 P1.16 P1.18 P1.20 P2. P2.3 P2.6 P3. P3.3 P3.6 P4. P5. P6. P7. U1.1 U1.2 U1.3 U1.4 U1.5 U1.7 U1.8 U1.9 U1.15 U1.16 U1.17 U1.18 U1.23 U1.24 U1.25 U1.26 U1.29 U1.33 U1.34 U1.35 U1.36 U1.37 U1.38 U1.43 U1.44 U1.45 U1.46 U1.54 U1.55 U1.56 U1.57 U1.59 U1.60 U1.61 U1.62 U1.63 U1.64 U1.65 U1.66 U1.67 U1.77 U1.78 U1.79 U1.80 U1.90 U1.91 U1.92 U1.93 U1.95 U1.96 U1.97 U1.98 U4.2 U4.6 U4.9 U4.10 U4.12 U4.13 U4.14 U4.27 U4.28

## Polygon pours and split planes (outlines as drawn)
GND on Top Layer "GND - TOP" (solid, remove dead copper, pour order 6): 0.34,4272.93 2316.32,4272.93 2319.19,4270.06 2319.19,0 2.59,0
GND on Bottom Layer "GND - BOTTOM" (solid, remove dead copper, pour order 10): 1.2,4272.06 2312.47,4272.06 2314.9,4269.63 2318.54,4265.99 2318.54,0 3.02,0

## Keep-outs
Keep-Out Layer:
  circle w10: c1204.05,139.25 r100
  circle w10: c2145.85,139.25 r100
  circle w10: c2145.85,4140.77 r100
  circle w10: c264.22,4140.77 r100
  lines w1: -0.21,4272.67 -0.04,4272.49 -0.04,-0.49 71.19,-0.49 1010.26,-0.49 2316.19,-0.49 2316.19,4272.85 2316,4272.67 -0.21,4272.67

## Other copper
Top Layer:

## Silkscreen, mask and mechanical layers (free items; w line width, h text height)
Top Overlay:
  text "CCS v4.0 / Logan Hunter" at 1018.56,784.67 h100